# Altium PCB 3D_Scanner_PCB.PcbDoc
Units mil, origin at the board's own origin, x right, y up, seen from the top; angles counter-clockwise.
Board outline 3661.42 x 3543.31 mil, 2 copper layers (Top Layer, Bottom Layer); 22 components, 29 nets, 131 pads, 16 vias.
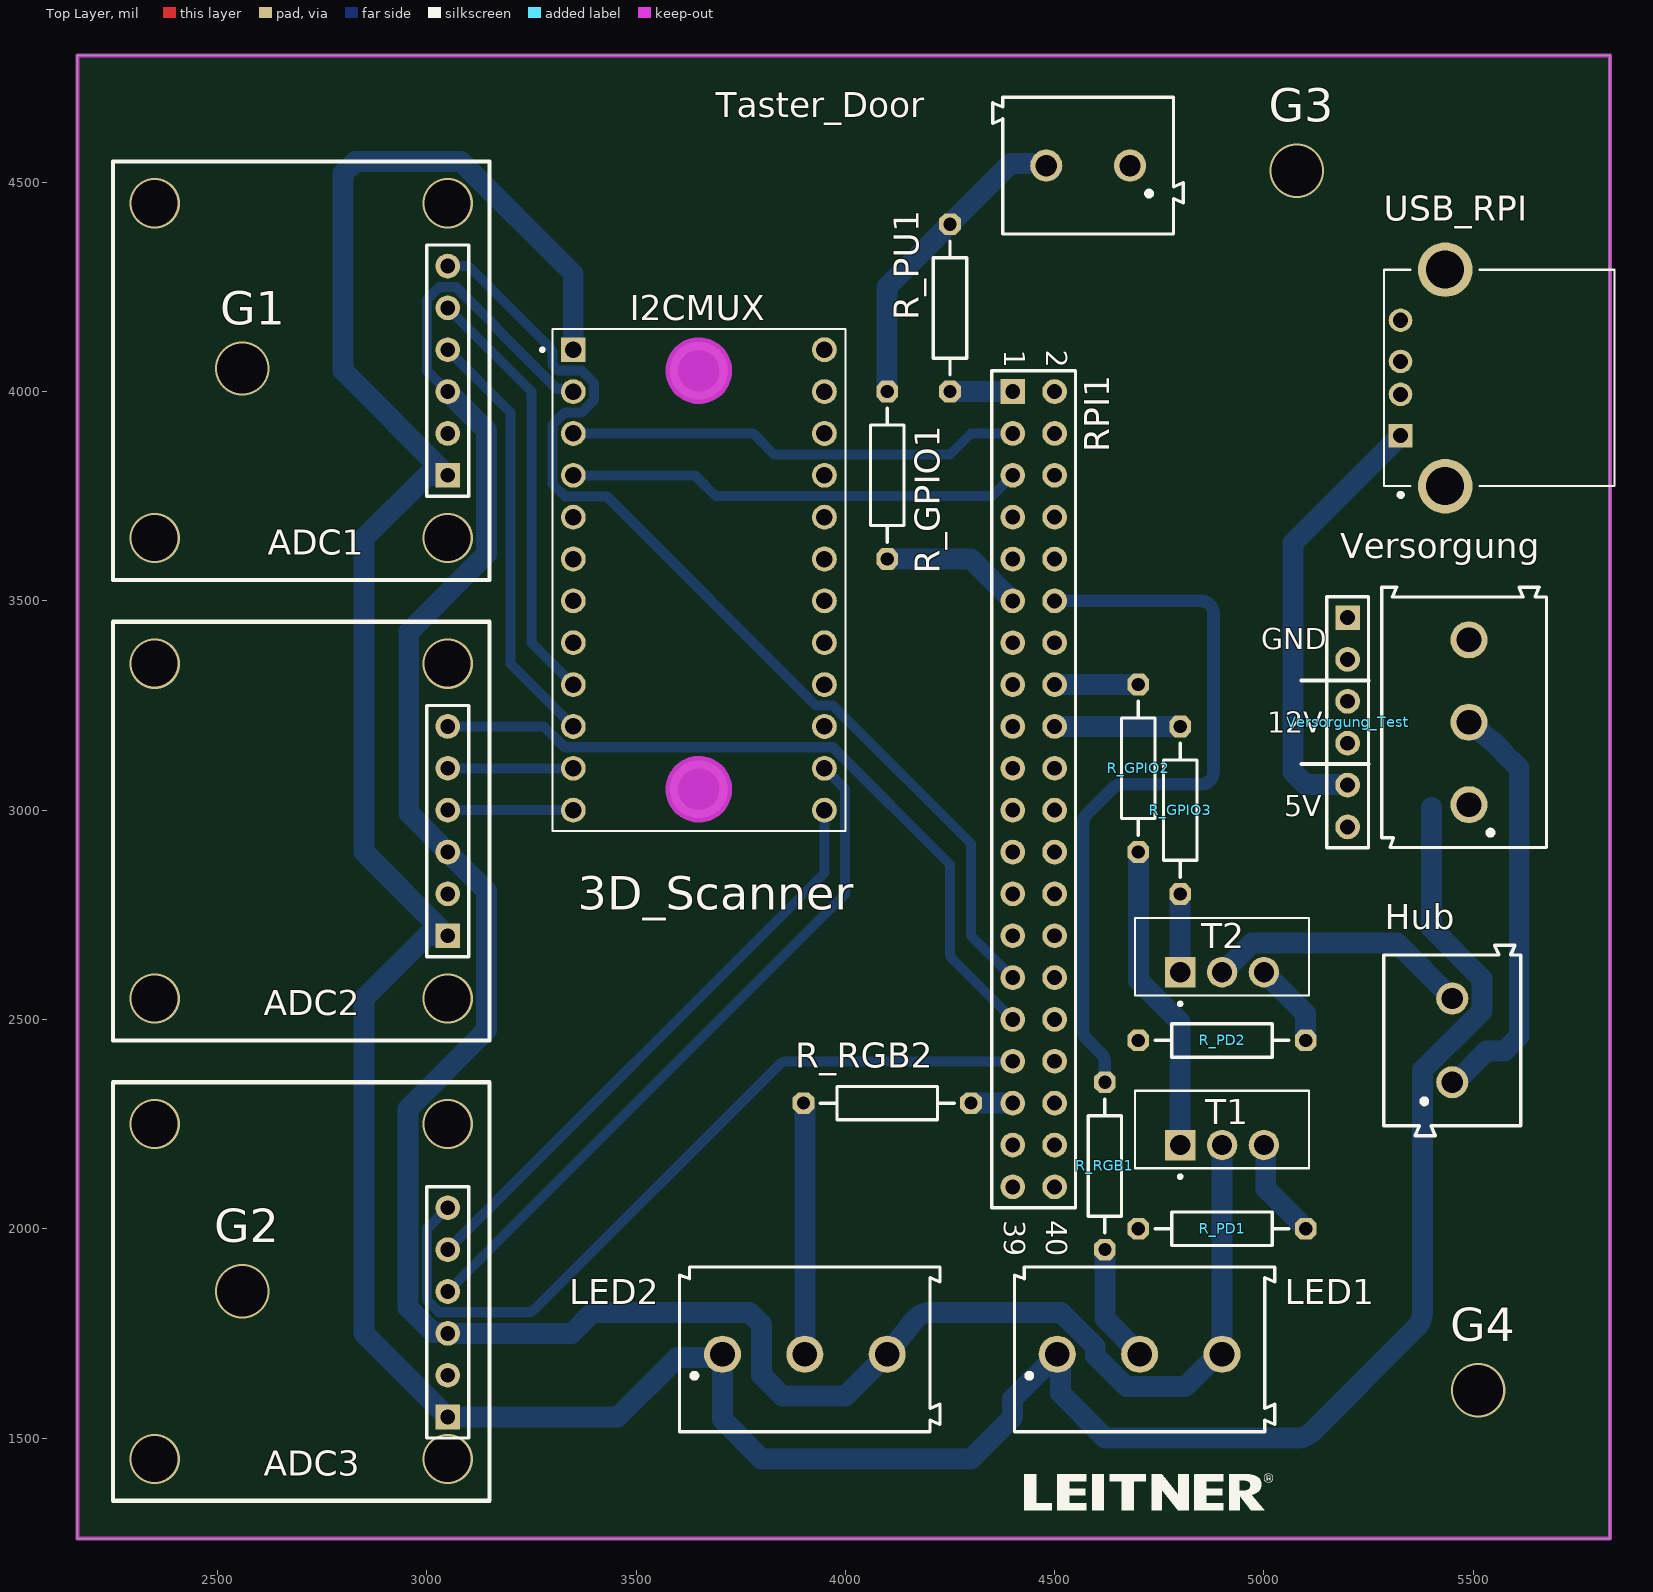
[diagram p0: Top Layer view]
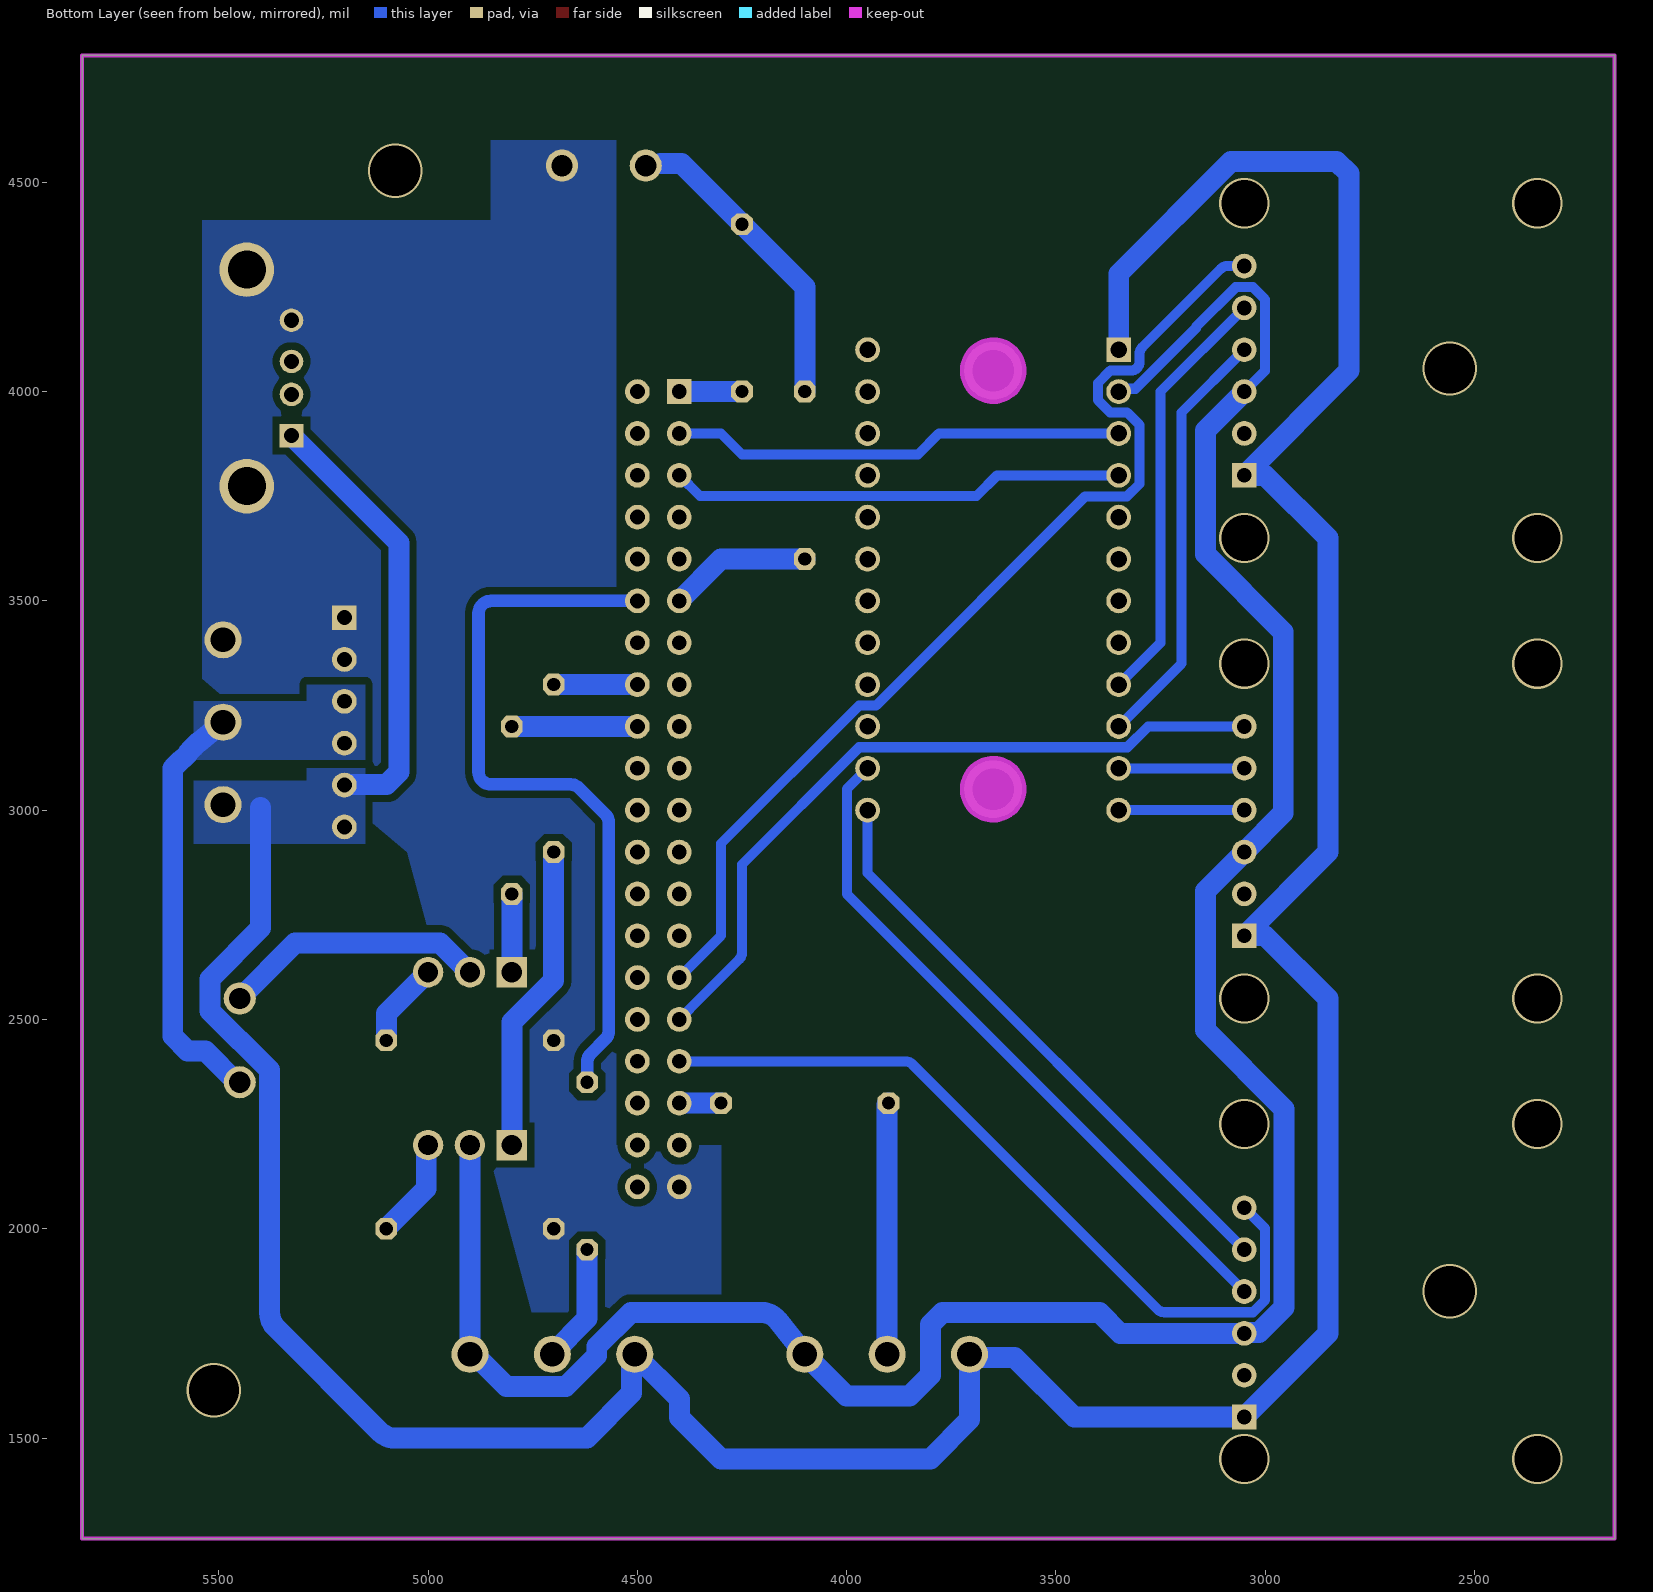
[diagram p1: Bottom Layer view, seen from below]
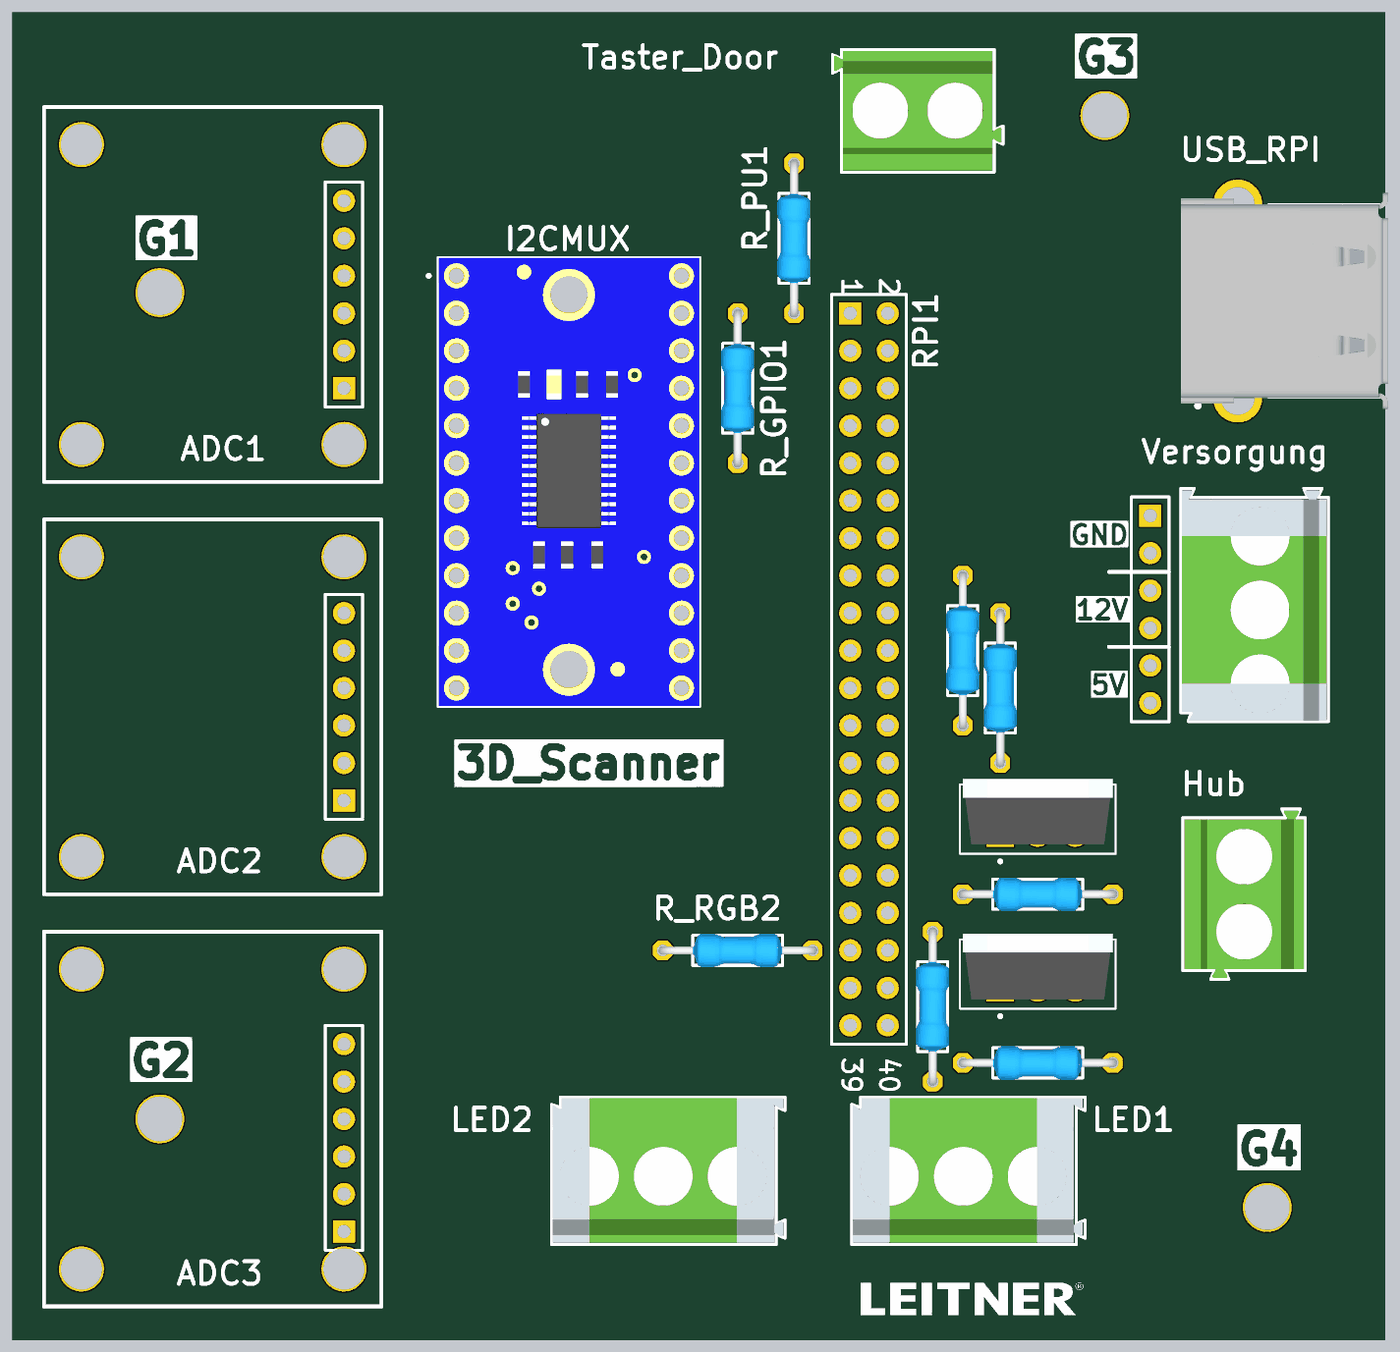
[diagram p2: 3D render of the assembled board from above, using the file's embedded part models]

## Layer stack, top to bottom
Top Solder: solder mask 0.4, Solder Resist, Dk 3.5
Top Layer: signal copper 1.4
Dielectric 1: dielectric 12.6, FR-4, Dk 4.8
Bottom Layer: signal copper 1.4
Bottom Solder: solder mask 0.4, Solder Resist, Dk 3.5

## Board outline
2165.35,1259.84 2165.35,4803.15 5826.77,4803.15 5826.77,1259.84

## Design rules (kind name [scope] priority, off if disabled: settings)
Clearance [InNet('GND')] p1: gap=18 ignorepadtopadclearanceinfootprint=FALSE
PlaneConnect [All] p1: planeconnectstyle=Direct reliefexpansion=20 reliefentries=4 reliefconductorwidth=10 reliefairgap=10
PolygonConnect [All] p1: connectstyle=Direct reliefconductorwidth=10 reliefentries=4 polygonreliefangle="90 Angle" airgapwidth=10
RoutingVias [All] p1: holewidth=28 width=50 viastyle="Through Hole" minholewidth=28 minwidth=50 maxholewidth=28 maxwidth=50
SolderMaskExpansion [All] p1: expansion=4 istentingtop=FALSE
SupplyNets "Schematic Supply Nets_18" [InNet('SDA2')] p1: voltage=0.000
SupplyNets "Schematic Supply Nets_17" [InNet('SDA3')] p2: voltage=0.000
SupplyNets "Schematic Supply Nets_16" [InNet('SCL2')] p3: voltage=0.000
SupplyNets "Schematic Supply Nets_15" [InNet('SCL3')] p4: voltage=0.000
SupplyNets "Schematic Supply Nets_14" [InNet('SDA1')] p5: voltage=0.000
SupplyNets "Schematic Supply Nets_13" [InNet('SCL1')] p6: voltage=0.000
SupplyNets "Schematic Supply Nets_12" [InNet('SCL')] p7: voltage=0.000
SupplyNets "Schematic Supply Nets_11" [InNet('PWM0')] p8: voltage=0.000
SupplyNets "Schematic Supply Nets_10" [InNet('SDA')] p9: voltage=0.000
SupplyNets "Schematic Supply Nets_9" [InNet('DRDY1')] p10: voltage=0.000
SupplyNets "Schematic Supply Nets_8" [InNet('GND_MOS_12V')] p11: voltage=0.000
SupplyNets "Schematic Supply Nets_7" [InNet('PWM1')] p12: voltage=0.000
SupplyNets "Schematic Supply Nets_6" [InNet('DRDY2')] p13: voltage=0.000
SupplyNets "Schematic Supply Nets_5" [InNet('GND_MOS_5V')] p14: voltage=0.000
SupplyNets "Schematic Supply Nets_4" [InNet('DRDY3')] p15: voltage=0.000
SupplyNets "Schematic Supply Nets_3" [InNet('3V3')] p16: voltage=0.000
SupplyNets "Schematic Supply Nets_2" [InNet('+5V')] p17: voltage=0.000
SupplyNets "Schematic Supply Nets_1" [InNet('GND')] p18: voltage=0.000
SupplyNets "Schematic Supply Nets" [InNet('+12V')] p19: voltage=0.000
Width [All] p1: maxlimit=50 minlimit=10 preferedwidth=10 minimp=50.000000 maximp=50.000000 favimp=50.000000
29 further rules are at their usual default settings.

## Components (designator, comment, footprint, x,y, rotation, side; value= is the part's Value field where it differs from the comment)
ADC1 "NAU7802" HDR1X6 3050,3800 r90 top
ADC2 "NAU7802" HDR1X6 3050,2700 r90 top
ADC3 "NAU7802" HDR1X6 3050,1550 r90 top
Hub "691213510002" 691213510002 5450,2450 r90 top
I2CMUX "PCA9548A" MODULE_2717 3650,3550 r0 top
LED1 "691216710003" 691216710003 4703.15,1700 r0 top
LED2 "691216710003" 691216710003 3903.15,1700 r0 top
R_GPIO1 "330R" R_0207/RM4 4100,3800 r90 top
R_GPIO2 "330R" R_0207/RM4 4700,3100 r90 top
R_GPIO3 "330R" R_0207/RM4 4800,3000 r90 top
R_PD1 "10K" R_0207/RM4 4900,2000 r180 top
R_PD2 "10K" R_0207/RM4 4900,2450 r0 top
R_PU1 "10K" R_0207/RM4 4250,4200 r270 top
R_RGB1 "330R" R_0207/RM4 4620,2150 r90 top
R_RGB2 "330R" R_0207/RM4 4100,2300 r180 top
RPI1 "Raspberry Pi 5" HDR2X20 4400,4000 r270 top
T1 "IRLZ44N" TO254P1054X469X1930-3 4900,2237.01 r0 top
T2 "IRLZ44N" TO254P1054X469X1930-3 4900,2650 r0 top
Taster_Door "691213510002" 691213510002 4580,4540 r180 top
USB_RPI "6364372-2" TE_6364372-2 5433.07,4032.68 r90 top
Versorgung "691216710003" 691216710003 5490,3210 r90 top
Versorgung_Test "Aditional Pins" HDR1X6 5200,3460 r270 top

## Footprints (in the part's own frame and the unit in brackets; to place one, negate y for a bottom-side part, rotate by r counter-clockwise, add the part's x,y. Pads: shape width x height; smd on the part's side, far side on the other; paste and mask are expansions set on the pad)
691213510002 [mm]
  round 1.95 hole 1.3: 1(-2.54,0) 2(2.54,0)
  silkscreen extent -5.78,-4.15 5.78,4.15, body extent -5.68,-4.06 5.68,4.04, height 10
691216710003 [mm]
  round 2.25 hole 1.5: 1(-5,0) 2(0,0) 3(5,0)
  silkscreen extent -7.6,-4.7 8.2,5.3, body extent -7.55,-4.57 8.05,5.23, height 13.8
HDR1X6 [mm] "Connector; Header; 6 Position"
  rect 1.5x1.5 hole 0.9: 1(0,0)
  round 1.5 hole 0.9: 2(2.54,0) 3(5.08,0) 4(7.62,0) 5(10.16,0) 6(12.7,0)
  silkscreen extent -1.27,-1.27 13.97,1.27
HDR2X20 [mm] "Connector; Header; 20x2 Position"
  rect 1.5x1.5 hole 0.9: 1(0,0)
  round 1.5 hole 0.9: 2(0,2.54) 3(2.54,0) 4(2.54,2.54) 5(5.08,0) 6(5.08,2.54) 7(7.62,0) 8(7.62,2.54) 9(10.16,0) 10(10.16,2.54) 11(12.7,0) 12(12.7,2.54) 13(15.24,0) 14(15.24,2.54) 15(17.78,0) 16(17.78,2.54) 17(20.32,0) 18(20.32,2.54) 19(22.86,0) 20(22.86,2.54) 21(25.4,0) 22(25.4,2.54) 23(27.94,0) 24(27.94,2.54) 25(30.48,0) 26(30.48,2.54) 27(33.02,0) 28(33.02,2.54) 29(35.56,0) 30(35.56,2.54) 31(38.1,0) 32(38.1,2.54) 33(40.64,0) 34(40.64,2.54) 35(43.18,0) 36(43.18,2.54) 37(45.72,0) 38(45.72,2.54) 39(48.26,0) 40(48.26,2.54)
  silkscreen extent -1.27,-1.27 49.53,3.81
MODULE_2717 [mm]
  rect 1.508x1.508 / inner round 1.508 / far side rect 1.508x1.508 hole 1: 1(-7.62,13.97)
  round 1.508 hole 1: 2(-7.62,11.43) 3(-7.62,8.89) 4(-7.62,6.35) 5(-7.62,3.81) 6(-7.62,1.27) 7(-7.62,-1.27) 8(-7.62,-3.81) 9(-7.62,-6.35) 10(-7.62,-8.89) 11(-7.62,-11.43) 12(-7.62,-13.97) 13(7.62,-13.97) 14(7.62,-11.43) 15(7.62,-8.89) 16(7.62,-6.35) 17(7.62,-3.81) 18(7.62,-1.27) 19(7.62,1.27) 20(7.62,3.81) 21(7.62,6.35) 22(7.62,8.89) 23(7.62,11.43) 24(7.62,13.97)
  round 3.516 hole 2.5: P1(0,12.7) P2(0,-12.7)
  Keep-Out Layer circle w2.032: c0,12.7 r1
  Keep-Out Layer circle w2.032: c0,12.7 r1
  Keep-Out Layer circle w2.032: c0,-12.7 r1
  Keep-Out Layer circle w2.032: c0,-12.7 r1
  silkscreen extent -9.6,-15.24 8.89,15.24, body extent -8.89,-15.24 8.89,15.24, height 1.2
R_0207/RM4 [mil] "type 0207, RM4"
  oct 52x52 hole 31.5: 1(-200,0) 2(200,0)
  silkscreen extent -160,-40 160,40, body extent -211,-44 211,44, height 94
TE_6364372-2 [mm]
  rect 1.428x1.428 / inner round 1.428 / far side rect 1.428x1.428 hole 0.92: 1(-3.5,2.71)
  round 1.428 hole 0.92: 2(-1,2.71) 3(1,2.71) 4(3.5,2.71)
  round 3.316 hole 2.3: SH1(-6.57,0) SH2(6.57,0)
  silkscreen extent -7.2,-10.28 6.57,3.72, body extent -7.31,-10.16 7.31,3.84, height 7.43
TO254P1054X469X1930-3 [mm]
  rect 1.85x1.85 / inner round 1.85 / far side rect 1.85x1.85 hole 1.23: 1(-2.54,-0.94)
  round 1.85 hole 1.23: 2(0,-0.94) 3(2.54,-0.94)
  silkscreen extent -5.27,-2.96 5.27,2.35, body extent -5.08,-1.71 5.08,2.73, height 15.01

## Part data
ADC1 ADC2 ADC3 Versorgung_Test: library part "Header 6", "Header, 6-Pin", LatestRevisionDate=17-Jul-2002, LatestRevisionNote="Re-released for DXP Platform.", Publisher="Altium Limited"
Hub Taster_Door: "2 Position Wire to Board Terminal Block Horizontal with Board 0.200 (5.08mm) Through Hole", Package=None, Check_prices=https://www.snapeda.com/parts/691213510002/W%25C3%25BCrth+Elektronik+Midcom/view-part/?ref=eda, MF="WÃ¼rth Elektronik", MP=691213510002, SnapEDA_Link=https://www.snapeda.com/parts/691213510002/W%25C3%25BCrth+Elektronik+Midcom/view-part/?ref=snap
I2CMUX: library part 2717, "Module: multiplexer; I2C interface multiplexer; TCA9548A; 3Ã·5VDC", Package=None, Check_prices=https://www.snapeda.com/parts/2717/Adafruit+Industries/view-part/?ref=eda, MF=Adafruit, MP=2717, SnapEDA_Link=https://www.snapeda.com/parts/2717/Adafruit+Industries/view-part/?ref=snap
LED1 LED2 Versorgung: "5.00 MM TERMINAL BLOCK;", Package=None, Check_prices=https://www.snapeda.com/parts/691216710003/W%25C3%25BCrth+Elektronik+Midcom/view-part/?ref=eda, MF="WÃ¼rth Elektronik", MP=691216710003, SnapEDA_Link=https://www.snapeda.com/parts/691216710003/W%25C3%25BCrth+Elektronik+Midcom/view-part/?ref=snap
R_GPIO1 R_GPIO2 R_GPIO3 R_PD1 R_PD2 R_PU1 R_RGB1 R_RGB2: library part R, "Resistor", LatestRevisionDate=07-Sep-2019, Published=21-Feb-2011, Usage="only permitted for non-commercial purposes at HTL I Innsbruck"
RPI1: library part "Header 20X2", "Header, 20-Pin, Dual row", LatestRevisionDate=17-Jul-2002, LatestRevisionNote="Re-released for DXP Platform.", Publisher="Altium Limited"
T1 T2: "N-Channel 55 V 47A (Tc) 3.8W (Ta), 110W (Tc) Surface Mount D2PAK", Package="TO-220-3 Infineon / IR", Availability="Not in stock", Check_prices=https://www.snapeda.com/parts/IRLZ44N/Infineon/view-part/?ref=eda, MF="Infineon / IR", MP=IRLZ44N, Price=None, SnapEDA_Link=https://www.snapeda.com/parts/IRLZ44N/Infineon/view-part/?ref=snap
USB_RPI: "Conn USB 2.0 Type A RCP 4 POS Solder RA Thru-Hole 4 Terminal 1 Port Box/Tube", Package=None, Check_prices=https://www.snapeda.com/parts/6364372-2/TE+Connectivity+AMP+Connectors/view-part/?ref=eda, Digi-Key_Part_Number=A122647-ND, EU_RoHS_Compliance=Compliant, MF="TE Connectivity", MP=6364372-2, Purchase-URL=https://pricing.snapeda.com/search/part/6364372-2/?ref=eda, SnapEDA_Link=https://www.snapeda.com/parts/6364372-2/TE+Connectivity+AMP+Connectors/view-part/?ref=snap

## Via types
v1: diameter 120, hole 110, Top Layer to Bottom Layer, 12 vias
v2: diameter 130, hole 120, Top Layer to Bottom Layer, 4 vias

## Nets (pads, with @x,y where several pads share a name; then routed paths per layer and width w, separated by ;. In a path a pad name is that pad's centre, name@x,y a point inside that pad or via, vN(x,y) a via of type N, cw(c..) or ccw(c..) an arc to the next point about the centre after c; other vN are vias at no path point)
3V3: R_PU1.2 RPI1.1 | length 150
  Bottom Layer w50: R_PU1.2 RPI1.1
+5V: ADC1.1 ADC2.1 ADC3.1 I2CMUX.1 LED1.1 LED2.1 USB_RPI.1 Versorgung.1 Versorgung_Test.5 Versorgung_Test.6 | length 9669.3
  Bottom Layer w50: I2CMUX.1 3350,4281.52 3081.52,4550 2829.29,4550 2800,4520.71 2800,4050 ADC1.1 3000,3800 2850,3650 2850,2900 ADC2.1 3000,2700 2850,2550 2850,1750 ADC3.1 3456.3,1550 3598.92,1692.62 3698.92,1692.62 LED2.1 3706.3,1543.7 3800,1450 4300,1450 4399.46,1549.46 4399.46,1593.16 LED1.1 4513.68,1692.62 4513.68,1607.03 4620.71,1500 5079.29,1500 ccw(c5079.29,1550) 5114.64,1514.64 5364.02,1764.02 ccw(c5328.61,1799.32) 5378.61,1799.32 5378.61,2379.57 5449.05,2450 5450.95,2450 5521.39,2520.43 5521.39,2596.59 5400,2717.98 5400,3006.3 ; Versorgung_Test.5 5198.27,3061.73 5099.29,3061.73 5070,3091.02 5070,3638.5 USB_RPI.1
+12V: Hub.1 Versorgung.2 Versorgung_Test.3 Versorgung_Test.4 | length 1008.8
  Bottom Layer w50: Hub.1 5457.24,2350 5531.89,2424.64 5574.64,2424.64 5610,2460 5610,3100 5607.08,3102.92 5595.35,3114.65 ccw(c5560,3079.29) 5593.33,3116.56 ; Versorgung.2 5549.57,3161.37 cw(c5517.96,3122.64) 5552.87,3158.43 cw(c5517.96,3122.64) 5555.74,3155.39 ccw(c5593.6,3188.05) 5561.88,3149.4 5561.95,3149.33 cw(c5530.3,3110.63) 5572.28,3137.79 ccw(c5614.32,3164.87) 5580.94,3127.64 5580.99,3127.59 5593.32,3116.56
DRDY1: ADC1.6 RPI1.29 | length 2507
  Bottom Layer w24: ADC1.6 3090.06,4300 cw(c3090.06,4276) 3107.01,4292.99 3293.31,4106.69 cw(c3276.31,4089.74) 3300.31,4089.74 3300.31,4070.31 ccw(c3320.31,4070.31) 3320.31,4050.31 3369.95,4050.31 3399.69,4020.58 3399.69,3979.42 3370.27,3950 3329.73,3950 3300.31,3920.58 3300.31,3779.42 3330.05,3749.69 3430.05,3749.69 3929.42,3250.31 3969.95,3250.31 4300,2920.27 4300,2700 RPI1.29
DRDY2: ADC2.6 RPI1.31 | length 1767.9
  Bottom Layer w24: ADC2.6 3279.73,3200 3329.42,3150.31 3969.95,3150.31 4250,2870.27 4250,2659.94 ccw(c4274,2659.94) 4257,2643 4346.67,2553.33 RPI1.31
DRDY3: ADC3.6 RPI1.33 | length 1899.2
  Bottom Layer w24: ADC3.6 3000,2000 3000,1829.96 3029.49,1800.47 3240.53,1800.47 ccw(c3240.53,1824.47) 3257.47,1807.47 3843,2393 cw(c3859.94,2376) 3859.94,2400 RPI1.33
GND: R_PD1.2 R_PD2.1 RPI1.39 Taster_Door.1 USB_RPI.4 USB_RPI.SH1 USB_RPI.SH2 Versorgung.3 Versorgung_Test.1 Versorgung_Test.2
GND_MOS_5V: ADC1.3 ADC2.3 ADC3.3 I2CMUX.2 LED1.3 LED2.3 T1.2 | length 6015.9
  Bottom Layer w24: ADC1.3 3000.47,4049.53 3000.47,4220.52 3029.49,4249.53 3070.51,4249.53 3165.9,4154.14 3165.9,4151.19 3310.32,4006.77 3343.23,4006.77 I2CMUX.2
  Bottom Layer w50: ADC1.3 3143,3907 3143,3611.48 2957,3425.48 2957,2993 ADC2.3 3143,2807 3143,2474.52 2955,2286.52 2955,1811.32 3014.59,1751.73 3048.27,1751.73 ADC3.3 3346.36,1750 3396.36,1800 3770.71,1800 3800,1770.71 3800,1650 3850,1600 4000,1600 LED2.3 4165.02,1781.24 cw(c4204.06,1750) 4204.06,1800 4515.61,1800 4597.06,1718.54 4597.06,1696.78 4671.13,1622.71 4812.27,1622.71 4889.56,1700 LED1.3 T1.2
GND_MOS_12V: Hub.2 T2.2 | length 633.6
  Bottom Layer w50: T2.2 4901.83,2612.99 4971.25,2682.41 5317.59,2682.41 Hub.2
NetR_GPIO1_1: R_GPIO1.1 RPI1.11 | length 341.4
  Bottom Layer w50: R_GPIO1.1 4300,3600 RPI1.11
NetR_GPIO1_2: R_GPIO1.2 R_PU1.1 Taster_Door.2 | length 717
  Bottom Layer w50: R_GPIO1.2 4100,4250 R_PU1.1 4394.88,4544.88 Taster_Door.2@4444.88,4544.88
NetR_GPIO2_1: R_GPIO2.1 T1.1 | length 741.4
  Bottom Layer w50: R_GPIO2.1 4700,2593.49 4800,2493.49 T1.1
NetR_GPIO2_2: R_GPIO2.2 RPI1.16 | length 200
  Bottom Layer w50: RPI1.16 R_GPIO2.2
NetR_GPIO3_1: R_GPIO3.1 T2.1 | length 187
  Bottom Layer w50: T2.1 R_GPIO3.1
NetR_GPIO3_2: R_GPIO3.2 RPI1.18 | length 300
  Bottom Layer w50: RPI1.18 R_GPIO3.2
NetR_PD1_1: R_PD1.1 T1.3 | length 241.4
  Bottom Layer w50: T1.3 5004.37,2195.63 5004.37,2095.63 R_PD1.1
NetR_PD2_2: R_PD2.2 T2.3 | length 204.4
  Bottom Layer w50: T2.3 5099,2513.99 5099,2451 R_PD2.2
NetR_RGB1_2: R_RGB1.2 RPI1.12 | length 1784.9
  Bottom Layer w30: RPI1.12 4849.63,3500 cw(c4849.63,3470) 4879.63,3470 4879.63,3091.57 cw(c4849.63,3091.57) 4849.63,3061.57 4660.49,3061.57 ccw(c4660.49,3031.57) 4639.3,3052.81 4576.85,2990.35 ccw(c4598.06,2969.14) 4568.06,2969.14 4568.06,2473.99 ccw(c4598.06,2473.99) 4576.8,2452.83 4611.29,2418.07 cw(c4590,2396.94) 4620,2396.94 R_RGB1.2
NetR_RGB2_1: R_RGB2.1 RPI1.35 | length 100
  Bottom Layer w50: R_RGB2.1 RPI1.35
PWM0: LED1.2 R_RGB1.1 | length 284.4
  Bottom Layer w50: R_RGB1.1 4620,1785.55 4703.15,1702.4 LED1.2
PWM1: LED2.2 R_RGB2.2 | length 601.3
  Bottom Layer w50: R_RGB2.2 3903.15,2296.85 LED2.2
SCL: I2CMUX.4 RPI1.5 | length 1091.2
  Bottom Layer w24: I2CMUX.4 3640.23,3800 3689.92,3750.31 4350.31,3750.31 RPI1.5
SCL1: ADC1.4 I2CMUX.10 | length 1024.3
  Bottom Layer w24: ADC1.4 3200,3950 3200,3350 I2CMUX.10
SCL2: ADC2.4 I2CMUX.12 | length 300
  Bottom Layer w24: ADC2.4 I2CMUX.12
SCL3: ADC3.4 I2CMUX.14 | length 1664
  Bottom Layer w24: ADC3.4 3999.69,2799.69 3999.69,3050.31 I2CMUX.14
SDA: I2CMUX.3 RPI1.3 | length 1091.4
  Bottom Layer w24: I2CMUX.3 3779.79,3900 3829.79,3850 4250,3850 4300,3900 RPI1.3
SDA1: ADC1.5 I2CMUX.9 | length 1024.3
  Bottom Layer w24: ADC1.5 3250,4000 3250,3400 I2CMUX.9
SDA2: ADC2.5 I2CMUX.11 | length 300
  Bottom Layer w24: ADC2.5 I2CMUX.11
SDA3: ADC3.5 I2CMUX.13 | length 1422.8
  Bottom Layer w24: ADC3.5 3950,2850 I2CMUX.13
pads on no net: ADC1.2 ADC2.2 ADC3.2 I2CMUX.5 I2CMUX.6 I2CMUX.7 I2CMUX.8 I2CMUX.15 I2CMUX.16 I2CMUX.17 I2CMUX.18 I2CMUX.19 I2CMUX.20 I2CMUX.21 I2CMUX.22 I2CMUX.23 I2CMUX.24 I2CMUX.P1 I2CMUX.P2 RPI1.2 RPI1.4 RPI1.6 RPI1.7 RPI1.8 RPI1.9 RPI1.10 RPI1.13 RPI1.14 RPI1.15 RPI1.17 RPI1.19 RPI1.20 RPI1.21 RPI1.22 RPI1.23 RPI1.24 RPI1.25 RPI1.26 RPI1.27 RPI1.28 RPI1.30 RPI1.32 RPI1.34 RPI1.36 RPI1.37 RPI1.38 RPI1.40 USB_RPI.2 USB_RPI.3
copper on no net:
  other v1: 2350,1450 3050,1450 2350,2250 3050,2250 2350,2550 3050,2550 2350,3350 3050,3350 2350,3650 3050,3650 2350,4450 3050,4450
  other v2: 5511.81,1614.17 2559.06,1850.39 2559.06,4055.12 5078.74,4527.56

## Polygon pours and split planes (outlines as drawn)
GND on Bottom Layer "GND_L02_P003" (solid, remove dead copper, pour order 3): 4550,4600 4850,4600 4850,4409.45 5540,4409.45 5540,3313.78 5050,2900 4751.78,1800 4300,1800 4300,2200 4550,2200
+12V on Bottom Layer "+12V_L02_P001" (solid, remove dead copper, pour order 1): 5150,3300 5150,3120 5560,3120 5560,3260 5290,3260 5290,3300
+5V on Bottom Layer "+5V_L02_P000" (solid, remove dead copper, pour order 0): 5150,3100 5150,2920 5560,2920 5560,3070 5290,3070 5290,3100

## Keep-outs
Keep-Out Layer:
  the board outline again, w10

## Silkscreen, mask and mechanical layers (free items; w line width, h text height)
Top Overlay:
  drawing of 26 lines, arcs and shapes, not listed
  text "G3" at 5012.1,4645.05 h80
  text "G1" at 2506.68,4160.01 h80
  text "GND" at 4993.35,3385.01 h50
  text "12V" at 5007.52,3185.01 h50
  text "5V" at 5048.35,2985.01 h50
  text "3D_Scanner" at 3360.28,2761.95 h80
  text "G2" at 2492.41,1967.89 h80
  text "G4" at 5445.17,1731.67 h80

## Dimensions
2165.35,4803.15 to 2165.35,1259.84 on Mechanical 15
2165.35,4803.15 to 5826.77,4803.15 on Mechanical 15

## Text inside footprints (layer, text, board x,y; h text height)
RPI1: Top Overlay "39" at 4380,2020 h50 r270; Top Overlay "40" at 4480,2020 h50 r270; Top Overlay "2" at 4480,4100 h50 r270; Top Overlay "1" at 4380,4100 h50 r270